# EAGLE board Board_Light Project (EAGLE 9.2.2)
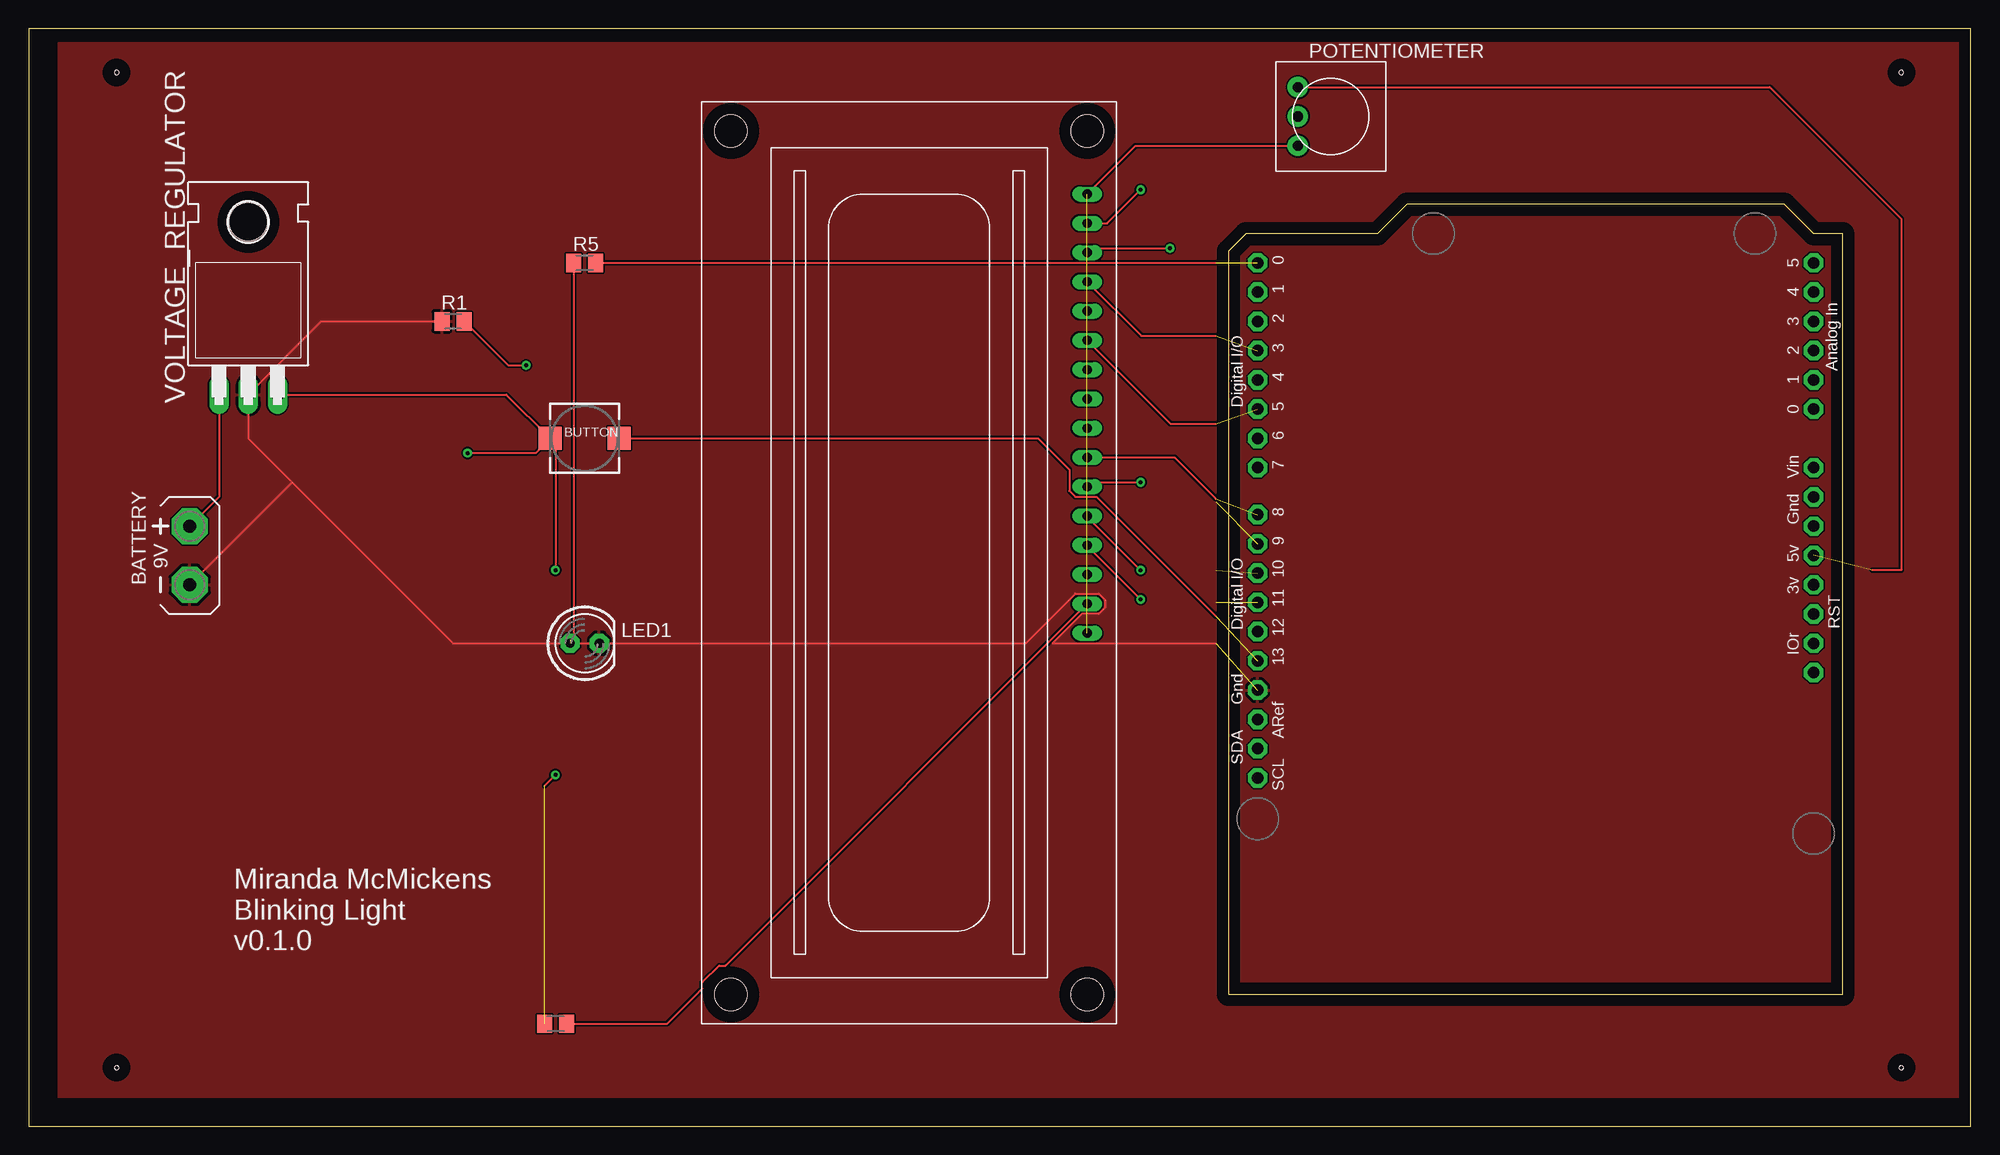
[diagram p0: board, top side]
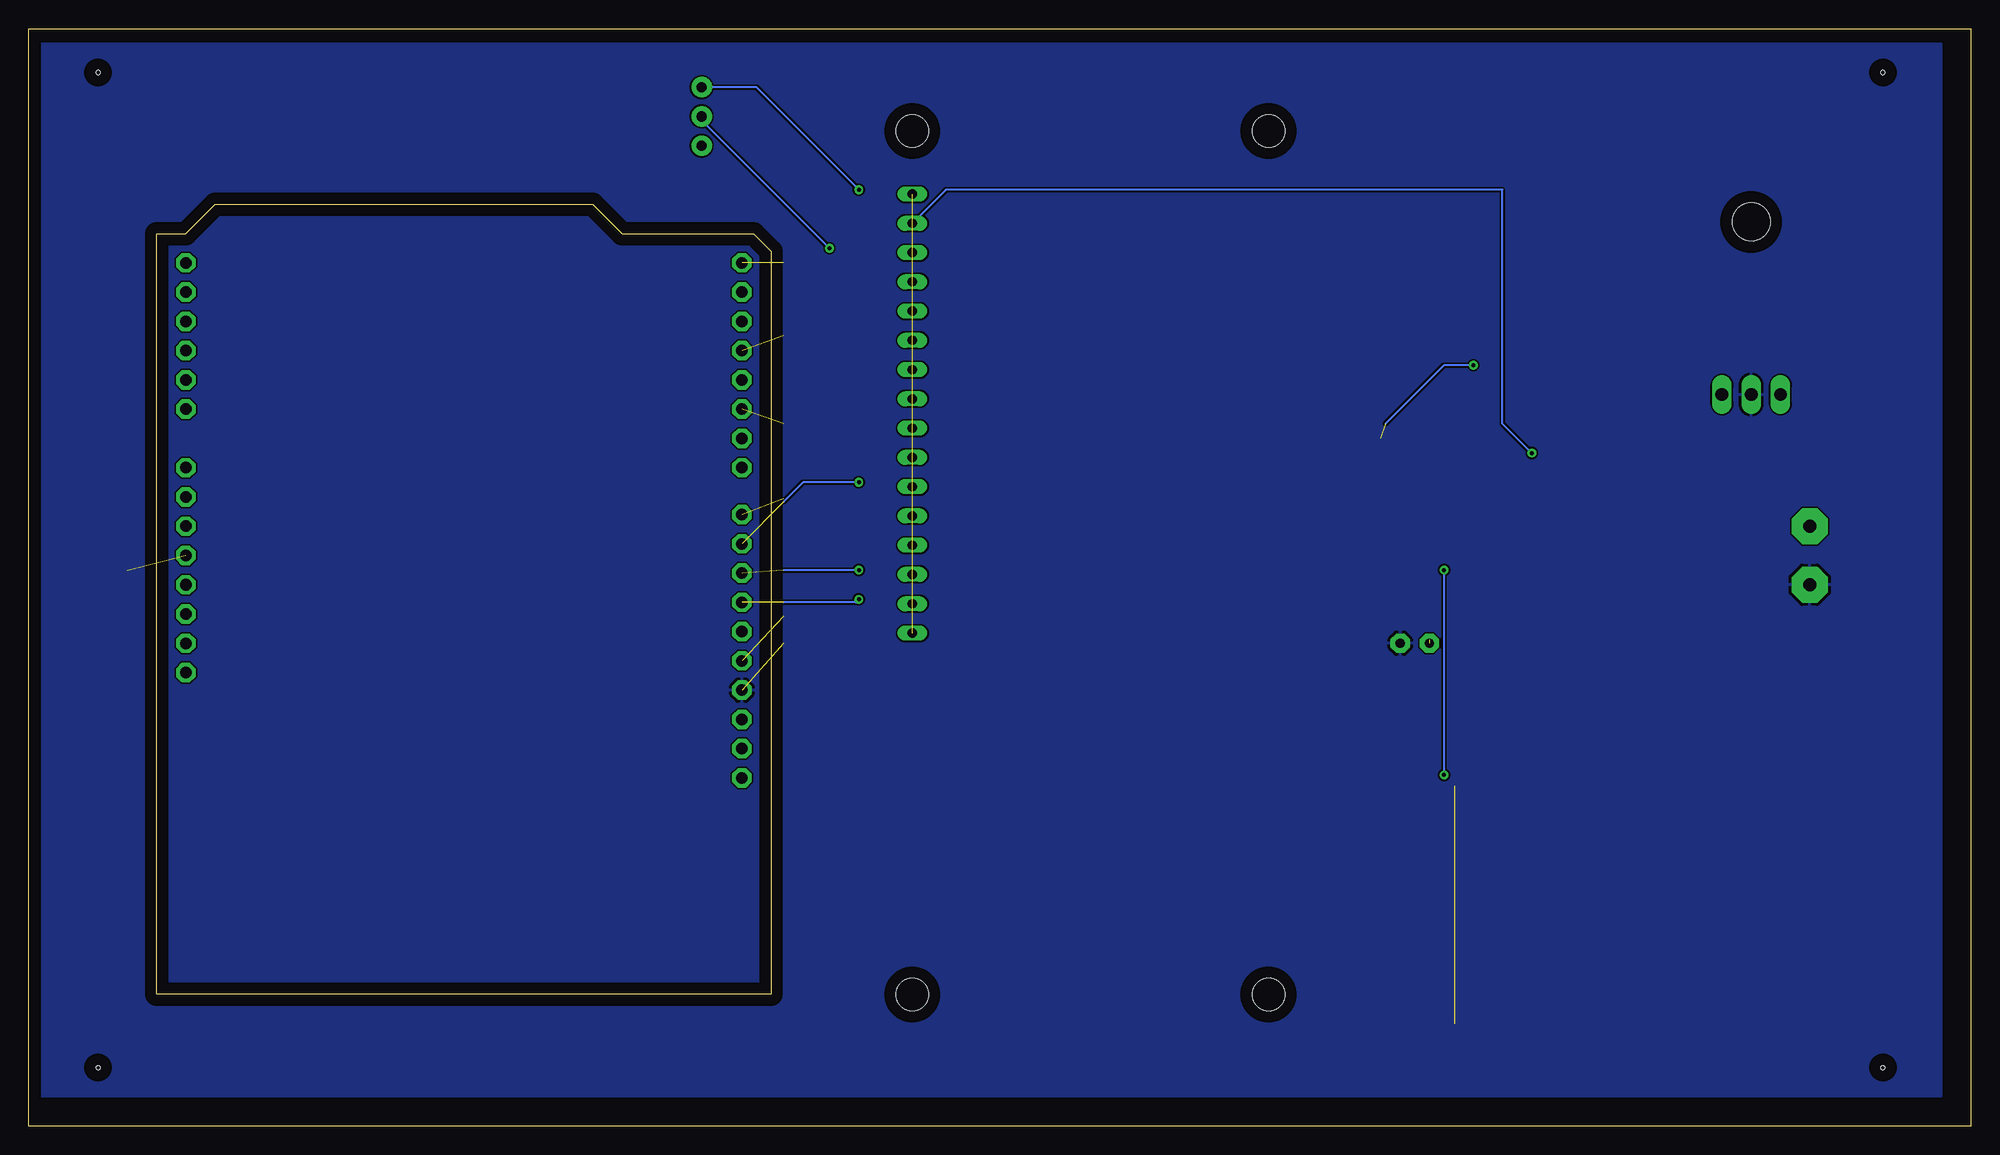
[diagram p1: board, bottom side, seen from below]

Size 168.58 x 95.24 mm. Coordinates in mm from the lower left corner, seen from the top.
Outline: 0,0 168.58,0 168.58,95.24 0,95.24 0,0
Copper layers (1*16): Top 0.035mm / dielectric 1.5mm / Bottom 0.035mm
Design rules "default": minimum track width 6mil, minimum drill 0.35mm, track to track 6mil, track to pad 6mil, pad to pad 6mil, via to via 6mil, smd to smd 6mil, copper to edge 40mil, drill to drill 6mil, minimum pad ring 10mil, minimum via ring 8mil, stop-mask expansion 4mil, vias tented up to drill 0mil, thermal gap 10mil
Holes 0.35 mm at 7.62,5.08 7.62,91.44 162.56,91.44 162.56,5.08

## Footprints (pad centres in the part's own frame; a part is rotated, then mirrored left to right if it is on the bottom)
ARDUINOR3 = drill 1 pad 1.676 octagon: 3V 35.56,2.54; 5V 38.1,2.54; A0 50.8,2.54; A1 53.34,2.54; A2 55.88,2.54; A3 58.42,2.54; A4 60.96,2.54; A5 63.5,2.54; AREF 23.876,50.8; D0 63.5,50.8; D1 60.96,50.8; D2 58.42,50.8; D3 55.88,50.8; D4 53.34,50.8; D5 50.8,50.8; D6 48.26,50.8; D7 45.72,50.8; D8 41.656,50.8; D9 39.116,50.8; D10 36.576,50.8; D11 34.036,50.8; D12 31.496,50.8; D13 28.956,50.8; GND 26.416,50.8; GND1 43.18,2.54; GND2 40.64,2.54; IOREF 30.48,2.54; RESERVED 27.94,2.54; RESET 33.02,2.54; SCL 18.796,50.8; SDA 21.336,50.8; VIN 45.72,2.54
AB9V = drill 1.118 pad 3.15 octagon: + 0,2.54; - 0,-2.54
PUSHBUTTON_SMD_SJ = smd 2 x 2: P$1 3,0; P$2 -3,0
LCD1602 = drill 0.8 long: 1 8,33.46; 2 10.54,33.46; 3 13.08,33.46; 4 15.62,33.46; 5 18.16,33.46; 6 20.7,33.46; 7 23.24,33.46; 8 25.78,33.46; 9 28.32,33.46; 10 30.86,33.46; 11 33.4,33.46; 12 35.94,33.46; 13 38.48,33.46; 14 41.02,33.46; 15 43.56,33.46; 16 46.1,33.46 | hole 2.8: 2.54,2.54; 2.54,33.46; 77.46,33.46; 77.46,2.54
LED5MM = drill 0.813 pad 1.676 octagon: A -1.27,0; K 1.27,0
TRIM-3386 = drill 0.9 pad 1.778: 1 -2.54,-2.857; 2 0,-2.857; 3 2.54,-2.857
M0805 = smd 1.3 x 1.6: 1 -0.95,0; 2 0.95,0
TO220H = drill 1.118 long: 1 -2.54,-10.16; 2 0,-10.16; 3 2.54,-10.16 | hole 3.302: 0,4.826

## Placement (x,y rotation side)
ARDUINO  ARDUINOR3-DIMENSION  [ARDUINOR3]  157.48,11.43 90 top
BATTERY  AB9V  [AB9V]  13.97,49.53 0 top
BUTTON  [PUSHBUTTON_SMD_SJ]  48.26,59.69 0 top
LCD_SCREEN  HD44780LCD-1602  [LCD1602]  58.42,88.9 270 top
LED1  [LED5MM]  48.26,41.91 0 top
POTENTIOMETER  10K  [TRIM-3386]  113.03,87.63 270 top
R1  100K  [M0805]  36.83,69.85 0 top
R3  200  [M0805]  45.72,8.89 0 top
R5  100K  [M0805]  48.26,74.93 0 top
VOLTAGE_REGULATOR  7805T  [TO220H]  19.05,73.66 0 top

## Library data of the parts
ARDUINO BUTTON LCD_SCREEN LED1 POTENTIOMETER R1 R3 R5 VOLTAGE_REGULATOR = adafruit
BATTERY = battery

## Nets
3V: ARDUINO.3V
+5V: ARDUINO.5V BUTTON.P$2 LCD_SCREEN.2 POTENTIOMETER.1 R3.1 VOLTAGE_REGULATOR.3
GND: ARDUINO.GND BATTERY.- LED1.K R1.1 VOLTAGE_REGULATOR.2
GND1: ARDUINO.GND1
GND2: ARDUINO.GND2
N$1: BATTERY.+ VOLTAGE_REGULATOR.1
N$5: ARDUINO.D13 BUTTON.P$1 R1.2
N$8: ARDUINO.D0 R5.2
N$9: LED1.A R5.1
N$11: ARDUINO.D10 LCD_SCREEN.12
N$12: ARDUINO.D9 LCD_SCREEN.11
N$13: ARDUINO.D8 LCD_SCREEN.10
N$14: ARDUINO.D5 LCD_SCREEN.6
N$15: ARDUINO.D3 LCD_SCREEN.4
N$16: LCD_SCREEN.3 POTENTIOMETER.2
N$17: LCD_SCREEN.15 R3.2
N$20: ARDUINO.D11 LCD_SCREEN.13
VIN: ARDUINO.VIN
VSS: LCD_SCREEN.1 LCD_SCREEN.5 LCD_SCREEN.16 POTENTIOMETER.3

## Tracks (layer width: path | path; a pad name or v marks a point on that pad's centre or on a via)
+5V  (via drill 0.35)  (2 unrouted)
  Top 0.152: VOLTAGE_REGULATOR.3 41.45,63.5 BUTTON.P$2 | BUTTON.P$2 45.72,59.23 v45.72,48.26 | BUTTON.P$2 43.99,58.42 v38.1,58.42 | POTENTIOMETER.1 151.13,90.17 162.56,78.74 162.56,48.26 160.02,48.26 | LCD_SCREEN.2 93.6,78.36 v96.52,81.28 | v45.72,30.48 44.77,29.53
  Bottom 0.152: v38.1,58.42 40.64,60.96 40.64,81.28 88.96,81.28 LCD_SCREEN.2 | v96.52,81.28 105.41,90.17 POTENTIOMETER.1 | v45.72,48.26 v45.72,30.48
GND  (1 unrouted)
  Top 0.152: 22.86,55.88 36.83,41.91 LED1.K 86.55,41.91 90.86,46.22 92.9,46.22 93.42,45.71 93.42,44.97 92.9,44.46 91.43,44.46 88.88,41.91 103.05,41.91 | 22.86,55.88 19.05,59.69 VOLTAGE_REGULATOR.2 25.4,69.85 R1.1 | BATTERY.- 22.86,55.88
  pour Top: 2.54,93.98 2.54,2.54 167.64,2.54 167.64,93.98
  pour Bottom: 2.54,93.98 2.54,2.54 167.64,2.54 167.64,93.98
N$1
  Top 0.152: VOLTAGE_REGULATOR.1 16.51,54.61 BATTERY.+
N$5  (via drill 0.35)  (2 unrouted)
  Top 0.152: R1.2 41.59,66.04 v43.18,66.04 | BUTTON.P$1 87.63,59.69 90.34,56.98 90.34,55.13 90.86,54.62 92.7,54.62 103.05,44.27
  Bottom 0.152: v43.18,66.04 45.72,66.04 50.8,60.96
N$8  (1 unrouted)
  Top 0.152: R5.2 103.05,74.93
N$9  (1 unrouted)
  Top 0.152: R5.1 47.31,42.23 47.3,42.22 46.99,42.22
N$11  (via drill 0.35)  (1 unrouted)
  Top 0.152: LCD_SCREEN.12 91.88,52.9 v96.52,48.26
  Bottom 0.152: v96.52,48.26 103.05,48.26
N$12  (via drill 0.35)  (1 unrouted)
  Top 0.152: LCD_SCREEN.11 92.26,55.88 v96.52,55.88
  Bottom 0.152: v96.52,55.88 101.35,55.88 103.05,54.18
N$13  (1 unrouted)
  Top 0.152: LCD_SCREEN.10 99.44,58.04 103.05,54.43
N$14  (1 unrouted)
  Top 0.152: LCD_SCREEN.6 99.12,60.96 103.05,60.96
N$15  (1 unrouted)
  Top 0.152: LCD_SCREEN.4 96.58,68.58 103.05,68.58
N$16  (via drill 0.35)
  Top 0.152: LCD_SCREEN.3 92.26,76.2 v99.06,76.2
  Bottom 0.152: v99.06,76.2 110.17,87.31 POTENTIOMETER.2
N$17
  Top 0.152: R3.2 55.43,8.89 58.47,11.93 58.47,12.47 59.93,13.93 60.47,13.93 LCD_SCREEN.15
N$20  (via drill 0.35)  (1 unrouted)
  Top 0.152: LCD_SCREEN.13 91.88,50.36 v96.52,45.72
  Bottom 0.152: v96.52,45.72 96.77,45.47 103.05,45.47
VSS  (2 unrouted)
  Top 0.152: LCD_SCREEN.1 96.07,85.09 POTENTIOMETER.3

## Text on the board
tSilk: Miranda McMickens / Blinking Light / v0.1.0